# Altium PCB UWB_R_v1.4.PcbDoc (part 2 of 2)
Units mm, origin at the board's own origin, x right, y up, seen from the top; angles counter-clockwise.
Board outline 610.01 x 38.17 mm, 2 copper layers (Top Layer, Bottom Layer); 33 components, 49 nets, 295 pads, 132 vias.
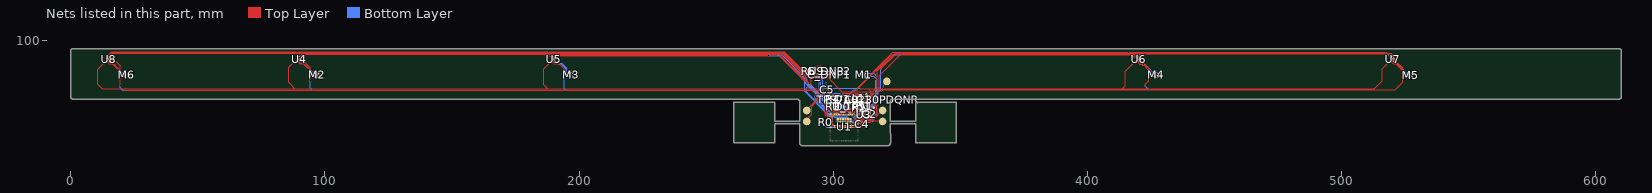
[diagram p2: the nets of this part, all layers, seen from the top]

## Via types
v1: diameter 0.3, hole 0.15, Top Layer to Bottom Layer, tented both sides, 97 vias
v2: diameter 0.3, hole 0.15, Top Layer to Bottom Layer, 23 vias
v3: diameter 0.5, hole 0.2, Top Layer to Bottom Layer, 12 vias

## Nets (pads, with @x,y where several pads share a name; then routed paths per layer and width w, separated by ;. In a path a pad name is that pad's centre, name@x,y a point inside that pad or via, vN(x,y) a via of type N, cw(c..) or ccw(c..) an arc to the next point about the centre after c; other vN are vias at no path point) (continued)
GND: C1.2 C2.2 C3.2 C4.2 C5.2 C_DNP1.1 C_DNP2.1 D0.1 D1.1 pad.14 pad.19 pad.21 R2.1 TPS7A0230PDQNR.2 TPS7A0230PDQNR.5 U1.1 U1.3 U1.5 U1.7 U1.9 U1.11 U1.13 U1.15 U1.16 U1.17 U1.19 U1.20 U1.21 U1.22 U1.23 U1.25 U1.27 U1.28 U1.29 U1.31 U1.33 U1.35 U1.37 U1.38 U1.39 U1.40 U1.41 U1.42 U1.43 U1.45 U1.47 U1.48 U1.49 U1.50 U1.51 U1.52 U1.53 U1.54 U1.55 U1.58 U1.59 U1.63 U1.71 U1.81 U1.83 U1.85 U1.87 U1.89 U1.91 U1.93 U1.95 U1.96 U1.97 U1.98 U1.99 U1.100 U1.101 U1.102 U1.103 U1.104 U1.105 U1.106 U1.107 U1.109 U1.110 U1.111 U1.112 U1.113 U1.114 U1.115 U1.116 U1.117 U1.118 U1.119 U1.120 U3.4 U3.9 U4.4 U4.9 U5.4 U5.9 U6.4 U6.9 U7.4 U7.9 U8.4 U8.9 U9.1 U9.6 U9.7 U_TPS1.3 U_TPS1.8 | length 698.2
  Top Layer w0.1: v3(15.54,92.771) 15.715,92.596 15.715,91.846 U8.4@15.74,91.821 17.907,91.821 19.558,90.17 v1(19.558,82.423) ; v1(21.082,80.645) v1(95.123,80.645) v1(194.818,80.645) v1(295.783,80.645) 296.545,79.883 296.545,79.248 v2(296.037,78.74) 291.592,74.295 291.592,71.12 289.56,69.088 pad.14@289.56,68.326 ; v3(90.466,92.837) 90.641,92.662 90.641,91.912 U4.4@90.666,91.887 92.009,91.887 94.361,89.535 v1(94.361,84.328) ; v3(190.542,92.837) 190.717,92.662 190.717,91.912 U5.4@190.742,91.887 191.45,91.887 194.183,89.154 v1(194.183,88.265) ; U9.7@292.997,88.924 U9.6@293.497,88.924 293.497,89.535 294.132,90.17 295.148,90.17 295.656,89.662 295.656,87.503 ; U9.1@294.659,87.261 295.414,87.261 295.656,87.503 ; C5.2@297.887,80.772 297.933,80.772 298.064,80.641 298.064,80.595 299.069,79.59 299.069,79.137 v1(299.466,78.74) ; C_DNP2.1@297.942,88.138 297.942,86.75 C_DNP1.1@297.951,86.741 296.164,86.741 v1(295.783,86.36) 295.783,87.376 295.656,87.503 ; U1.1@298.788,71.663 U1.1@298.961,71.49 299.204,71.247 299.654,71.247 U1.107@299.959,70.942 ; U1.16@298.811,67.09 298.811,66.34 U1.17@298.961,66.19 299.511,66.74 U1.19@300.011,66.74 ; U1.5@299.497,69.883 299.511,69.897 U1.3@299.511,70.34 299.511,70.44 U1.107@299.986,70.915 ; U1.5@299.511,69.84 U1.7@299.511,69.34 U1.9@299.511,68.84 U1.11@299.511,68.34 U1.13@299.511,67.84 U1.15@299.511,67.34 300.011,66.84 U1.19@300.011,66.74 ; U1.107@300.011,70.94 U1.105@300.511,70.94 U1.103@301.011,70.94 U1.101@301.511,70.94 U1.99@302.011,70.94 U1.97@302.511,70.94 U1.95@303.011,70.94 ; U1.20@300.261,66.04 300.511,66.29 ; U1.106@300.261,71.64 U1.104@300.761,71.64 U1.102@301.261,71.64 U1.100@301.761,71.64 U1.98@302.261,71.64 U1.96@302.761,71.64 302.761,71.29 303.011,71.04 U1.95@303.011,70.94 ; U1.22@300.761,66.04 300.761,66.14 300.661,66.24 300.561,66.24 300.511,66.29 ; U1.28@302.261,66.04 302.261,66.44 302.202,66.499 302.152,66.499 302.011,66.64 U1.27@302.011,66.74 ; v2(304.292,78.74) 304.522,78.51 D1.1@304.522,77.089 304.522,74.18 D0.1@304.534,74.168 ; U1.89@304.491,70.96 304.471,70.94 U1.91@304.011,70.94 U1.93@303.511,70.94 U1.95@303.011,70.94 ; U1.89@304.511,70.94 U1.87@305.011,70.94 U1.85@305.511,70.94 U1.83@306.011,70.94 U1.81@306.511,70.94 ; U1.117@304.761,68.34 U1.118@303.761,68.34 U1.119@302.761,68.34 U1.120@301.761,68.34 U1.114@301.761,69.34 U1.113@302.761,69.34 U1.112@303.761,69.34 U1.111@304.761,69.34 U1.110@305.744,69.34 ; v2(305.537,78.765) 305.562,78.74 307.34,78.74 ; U1.110@305.679,69.404 U1.110@305.744,69.34 ; U1.42@305.761,66.04 U1.40@305.261,66.04 U1.38@304.761,66.04 304.761,66.49 U1.37@304.511,66.74 ; U1.116@305.761,68.34 U1.115@306.761,68.34 ; v2(307.539,69.469) 307.485,69.469 307.358,69.342 306.763,69.342 U1.109@306.761,69.34 ; U1.53@308.511,66.74 U1.51@308.011,66.74 U1.49@307.511,66.74 U1.47@307.011,66.74 ; U1.63@309.011,68.84 308.111,68.84 308.052,68.781 308.052,67.999 308.111,67.94 308.911,67.94 U1.59@309.011,67.84 309.111,67.74 309.322,67.74 309.372,67.69 309.611,67.69 U1.58@309.711,67.59 310.407,67.59 C4.2@311.322,66.675 ; v2(309.561,71.49) 310.216,72.145 ; U3.4@311.259,72.045 311.159,72.145 310.216,72.145 ; U3.4@311.285,71.877 311.285,71.269 U3.9@311.434,71.12 ; C4.2@311.349,66.675 C4.2@311.322,66.675 ; v3(312.585,70.927) 312.585,70.777 312.785,70.576 313.335,70.576 313.387,70.524 C2.2@314.389,70.524 314.555,70.358 315.468,70.358 315.722,70.612 315.722,71.046 316.103,71.427 pad.21@316.103,71.501 ; pad.19@313.055,78.994 313.762,78.287 313.762,78.177 ; TPS7A0230PDQNR.2@314.267,77.165 314.248,77.146 314.073,77.146 TPS7A0230PDQNR.5@313.762,76.835 ; v1(314.833,79.248) 313.762,78.177 ; v1(315.535,79.949) 316.358,80.772 v1(424.053,80.772) 520.954,80.772 524.002,83.82 524.002,89.413 521.528,91.887 U7.4@520.815,91.887 520.79,91.912 520.79,92.662 v3(520.615,92.837) ; v3(420.666,92.837) 420.841,92.662 420.841,91.912 U6.4@420.866,91.887 421.452,91.887 421.472,91.907 424.053,89.325 424.053,84.328 422.656,82.931 v1(422.656,82.169) ; U1.19@300.011,66.74 U1.21@300.511,66.74 ; 300.511,66.29 U1.21@300.511,66.74 ; U1.21@300.511,66.74 U1.23@301.011,66.74 U1.25@301.511,66.74 U1.27@302.011,66.74 ; U1.27@302.011,66.74 U1.29@302.511,66.74 U1.31@303.011,66.74 U1.33@303.511,66.74 U1.35@304.011,66.74 U1.37@304.511,66.74 ; U1.37@304.511,66.74 U1.39@305.011,66.74 U1.41@305.511,66.74 U1.43@306.011,66.74 U1.45@306.511,66.74 U1.47@307.011,66.74 ; U1.110@305.744,69.34 U1.110@305.761,69.34 U1.109@306.761,69.34 ; U1.115@306.761,68.34 307.087,68.666 307.087,69.014 U1.109@306.761,69.34 ; U1.115@306.761,68.34 306.761,67.58 307.031,67.31 307.031,66.76 U1.47@307.011,66.74 ; U1.47@307.011,66.74 307.011,66.34 307.111,66.24 307.161,66.24 307.261,66.14 U1.48@307.261,66.04 U1.50@307.761,66.04 U1.52@308.261,66.04 U1.54@308.761,66.04 309.411,66.04 U1.55@309.561,66.19 310.837,66.19 C4.2@311.322,66.675 ; 307.34,78.74 308.102,78.74 308.483,79.121 311.095,79.121 311.313,78.903 311.313,76.477 311.372,76.418 C1.2@312.111,76.418 312.781,76.418 313.126,76.073 313.508,76.073 313.762,76.327 TPS7A0230PDQNR.5@313.762,76.835 ; 307.34,78.74 308.039,78.041 C3.2@308.039,76.835 307.948,76.744 U_TPS1.8@307.948,75.004 U_TPS1.3@307.948,73.554 308.023,73.479 308.023,73.231 308.347,72.907 309.722,72.907 310.031,73.216 310.081,73.216 310.206,73.341 310.216,73.331 310.216,72.145 ; TPS7A0230PDQNR.5@313.762,76.835 313.762,78.177
  Bottom Layer w0.1: v1(19.558,82.423) 19.558,81.661 20.574,80.645 v1(21.082,80.645) ; v1(94.361,84.328) 94.361,81.407 v1(95.123,80.645) ; v1(194.183,88.265) 194.183,81.28 v1(194.818,80.645) ; v1(295.783,80.645) v1(295.783,86.36) ; v2(296.037,78.74) v1(299.466,78.74) v2(304.292,78.74) 304.305,78.753 305.524,78.753 v2(305.537,78.765) ; v2(307.539,69.469) 307.544,69.469 307.925,69.85 307.925,69.854 v2(309.561,71.49) ; v1(314.833,79.248) v1(315.535,79.949) ; v1(422.656,82.169) v1(424.053,80.772)
  other v3: 311.485,70.927 14.44,92.771 89.366,92.837 189.442,92.837 419.566,92.837 519.515,92.837
HB1_H: U1.73 U3.5 | length 3.2
  Top Layer w0.1: U1.73@308.511,70.94 310.447,70.94 311.285,70.102 U3.5@311.285,69.977
HB1_V: U1.61 U3.6 | length 5.3
  Top Layer w0.1: v2(308.343,68.368) 308.983,68.368 U1.61@309.011,68.34 ; v2(310.515,69.342) 311.531,69.342 311.785,69.596 U3.6@311.785,69.977
  Bottom Layer w0.1: v2(308.343,68.368) 310.049,68.368 310.515,68.834 v2(310.515,69.342)
HB2_H: U1.80 U4.5 | length 226.5
  Top Layer w0.1: U4.5@90.666,93.787 90.666,94.146 91.262,94.742 278.13,94.742 v1(289.687,83.185) ; v1(304.546,72.898) 304.927,72.517 306.197,72.517 306.733,71.981 306.733,71.668 U1.80@306.761,71.64
  Bottom Layer w0.1: v1(289.687,83.185) 297.434,75.438 302.006,75.438 v1(304.546,72.898)
HB2_V: U1.82 U4.6 | length 228.5
  Top Layer w0.1: U4.6@90.166,93.787 90.166,93.912 91.25,94.996 279.908,94.996 v1(289.814,85.09) ; v1(304.038,72.898) 304.673,72.263 305.943,72.263 306.225,71.981 306.225,71.676 U1.82@306.261,71.64
  Bottom Layer w0.1: v1(289.814,85.09) 289.814,84.387 289.22,83.793 289.22,83.144 297.18,75.184 301.752,75.184 v1(304.038,72.898)
HB3_H: U1.78 U5.5 | length 126.5
  Top Layer w0.1: U5.5@190.742,93.787 190.767,93.812 190.767,94.12 190.881,94.234 v1(274.574,94.234) ; v1(279.4,94.107) 289.723,83.784 v1(289.723,83.744) ; v1(305.054,72.898) 306.324,72.898 307.241,71.981 307.241,71.66 U1.78@307.261,71.64
  Bottom Layer w0.1: v1(274.574,94.234) 279.241,94.234 279.368,94.107 v1(279.4,94.107) ; v1(289.723,83.744) 289.723,83.657 297.688,75.692 302.26,75.692 v1(305.054,72.898)
HB3_V: U1.76 U5.6 | length 127.7
  Top Layer w0.1: U5.6@190.242,93.787 190.242,93.912 190.818,94.488 v1(277.749,94.488) ; v1(289.052,85.09) 289.052,84.836 v1(290.703,83.185) ; v1(305.181,73.279) 306.451,73.279 307.749,71.981 307.749,71.652 U1.76@307.761,71.64
  Bottom Layer w0.1: v1(277.749,94.488) 279.654,94.488 v1(289.052,85.09) ; v1(290.703,83.185) 297.942,75.946 302.514,75.946 v1(305.181,73.279)
HB4_H: U1.74 U6.5 | length 128.5
  Top Layer w0.1: U1.74@308.261,71.64 308.261,72.041 308.737,72.517 v1(309.753,72.517) ; v1(316.23,78.994) v1(317.627,80.391) ; v1(318.071,81.524) 318.071,86.296 326.517,94.742 420.37,94.742 420.866,94.246 U6.5@420.866,93.787
  Bottom Layer w0.1: v1(309.753,72.517) 310.134,72.517 310.769,73.152 310.769,75.184 311.404,75.819 314.833,75.819 316.23,77.216 v1(316.23,78.994) ; v1(317.627,80.391) 318.071,80.835 v1(318.071,81.524)
HB4_V: U1.90 U6.6 | length 130.4
  Top Layer w0.1: v1(303.784,72.517) 304.261,72.04 U1.90@304.261,71.64 ; v1(309.245,80.772) v1(322.961,94.488) ; v1(326.771,94.488) 420.116,94.488 420.366,94.238 U6.6@420.366,93.787
  Bottom Layer w0.1: v1(303.784,72.517) 305.197,72.517 305.435,72.755 305.435,78.105 308.102,80.772 v1(309.245,80.772) ; v1(322.961,94.488) v1(326.771,94.488)
HB5_H: U1.67 U7.5 | length 231.3
  Top Layer w0.1: v1(308.483,69.85) 309.001,69.85 U1.67@309.011,69.84 ; v1(317.373,81.534) 317.373,88.265 324.358,95.25 519.477,95.25 520.815,93.912 U7.5@520.815,93.787
  Bottom Layer w0.1: v1(308.483,69.85) 310.261,71.628 310.261,72.136 310.769,72.644 313.563,72.644 317.373,76.454 v1(317.373,81.534)
HB5_V: U1.65 U7.6 | length 230.8
  Top Layer w0.1: v1(308.483,69.342) 308.485,69.34 U1.65@309.011,69.34 ; v1(318.77,89.027) 324.739,94.996 519.231,94.996 520.315,93.912 U7.6@520.315,93.787
  Bottom Layer w0.1: v1(308.483,69.342) 310.515,71.374 310.515,72.009 310.896,72.39 313.817,72.39 317.754,76.327 317.754,79.883 318.77,80.899 v1(318.77,89.027)
HB6_H: U1.56 U8.5 | length 311.2
  Top Layer w0.1: U8.5@15.74,93.721 15.74,94.48 16.51,95.25 280.162,95.25 v1(289.433,85.979) ; v1(308.991,66.929) 309.045,66.929 309.106,66.99 309.611,66.99 U1.56@309.711,67.09
  Bottom Layer w0.1: v1(289.433,85.979) 289.433,84.884 288.723,84.174 288.723,80.212 298.069,70.866 299.466,70.866 300.355,69.977 305.435,69.977 308.445,66.967 308.953,66.967 v1(308.991,66.929)
HB6_V: U1.57 U8.6 | length 312.4
  Top Layer w0.1: U8.6@15.24,93.721 15.24,94.488 16.256,95.504 280.416,95.504 291.338,84.582 291.338,83.058 v1(290.068,81.788) ; v1(308.356,67.437) 308.453,67.34 U1.57@309.011,67.34
  Bottom Layer w0.1: v1(290.068,81.788) 289.687,81.788 289.306,81.407 289.306,80.01 298.196,71.12 299.593,71.12 300.482,70.231 305.562,70.231 v1(308.356,67.437)
LED0: R3.1 U1.2 | length 5.4
  Top Layer w0.1: U1.2@298.811,70.59 297.837,70.59 297.434,70.993 297.434,72.512 297.443,72.512 298.999,74.068 R3.1@298.999,74.168
LED1: R4.1 U1.4 | length 9.7
  Top Layer w0.1: U1.4@298.811,70.09 297.702,70.09 296.926,70.866 296.926,75.692 298.233,76.999 298.909,76.999 R4.1@298.999,77.089
M1N: M1.2 U3.3 | length 22.4
  Top Layer w0.1: U3.3@311.785,71.877 v1(311.785,73.025) ; M1.2@311.979,87.214 v1(312.014,87.249) ; v1(316.611,84.836) v1(316.611,85.979)
  Bottom Layer w0.1: v1(311.785,73.025) 312.166,73.406 313.436,73.406 316.611,76.581 v1(316.611,84.836) ; v1(312.014,87.249) 315.976,87.249 316.611,86.614 v1(316.611,85.979)
M1P: M1.1 U3.2 | length 21.3
  Top Layer w0.1: U3.2@312.285,71.877 312.289,71.881 312.289,73.021 v1(312.293,73.025)
  Bottom Layer w0.1: v1(312.013,86.042) 312.077,86.106 315.976,86.106 316.992,85.09 316.992,76.581 313.436,73.025 v1(312.293,73.025)
M2N: M2.2 U4.3 | length 9
  Top Layer w0.1: U4.3@90.166,91.887 90.166,91.444 90.297,91.313 91.694,91.313 v1(93.853,89.154)
  Bottom Layer w0.1: v1(93.853,89.154) 95.793,87.214 v1(96.968,87.214)
M2P: M2.1 U4.2 | length 10.4
  Top Layer w0.1: U4.2@89.666,91.887 89.666,91.436 90.17,90.932 91.44,90.932 v1(93.604,88.768)
  Bottom Layer w0.1: v1(93.604,88.768) 94.996,87.376 94.996,86.673 95.69,85.979 96.933,85.979 v1(96.968,86.014)
M3N: M3.2 U5.3 | length 9.7
  Top Layer w0.1: U5.3@190.242,91.887 190.242,91.444 190.373,91.313 v1(191.643,91.313)
  Bottom Layer w0.1: v1(191.643,91.313) 193.167,91.313 195.199,89.281 195.199,87.884 195.777,87.306 v1(196.977,87.306)
M3P: M3.1 U5.2 | length 11.3
  Top Layer w0.1: U5.2@189.742,91.887 189.742,91.309 190.119,90.932 v1(192.024,90.932)
  Bottom Layer w0.1: v1(192.024,90.932) 192.913,90.932 194.691,89.154 194.691,86.868 195.453,86.106 v1(196.977,86.106)
M4N: M4.2 U6.3 | length 8.7
  Top Layer w0.1: U6.3@420.366,91.887 420.441,91.812 420.441,91.622 420.75,91.313 421.513,91.313 v1(422.021,90.805)
  Bottom Layer w0.1: v1(422.021,90.805) 422.555,90.805 426.146,87.214 v1(427.041,87.214)
M4P: M4.1 U6.2 | length 10.5
  Top Layer w0.1: U6.2@419.866,91.887 419.866,91.436 420.497,90.805 421.259,90.805 421.64,90.424 422.275,90.424 v1(423.545,89.154)
  Bottom Layer w0.1: v1(423.545,89.154) 424.942,87.757 424.942,86.673 425.601,86.014 v1(427.041,86.014)
M5N: M5.2 U7.3 | length 8.8
  Top Layer w0.1: U7.3@520.315,91.887 520.315,91.771 520.39,91.696 520.59,91.696 520.973,91.313 521.589,91.313 v1(523.367,89.535)
  Bottom Layer w0.1: v1(523.367,89.535) 525.723,87.179 v1(527.05,87.179)
M5P: M5.1 U7.2 | length 10
  Top Layer w0.1: U7.2@519.815,91.887 519.815,91.309 520.192,90.932 521.208,90.932 v1(523.367,88.773)
  Bottom Layer w0.1: v1(523.367,88.773) 526.161,85.979 v1(527.05,85.979)
M6N: M6.2 U8.3 | length 8.9
  Top Layer w0.1: U8.3@15.24,91.821 15.24,91.44 15.494,91.186 16.764,91.186 v1(19.05,88.9)
  Bottom Layer w0.1: v1(19.05,88.9) 20.701,87.249 22.003,87.249 v1(22.038,87.214)
M6P: M6.1 U8.2 | length 10.4
  Top Layer w0.1: U8.2@14.74,91.821 14.74,91.305 15.113,90.932 16.383,90.932 18.943,88.372 v1(18.945,88.372)
  Bottom Layer w0.1: v1(18.945,88.372) 19.939,87.378 19.939,86.741 20.666,86.014 v1(22.038,86.014)
NetD0_2: D0.2 R3.2 | length 2.1
  Top Layer w0.1: R3.2@300.949,74.168 D0.2@303.034,74.168
NetD1_2: D1.2 R4.2 | length 2.1
  Top Layer w0.1: R4.2@300.949,77.089 D1.2@303.022,77.089
NetL1_1: L1.1 U_TPS1.9 | length 4.8
  Top Layer w0.1: v2(308.809,78.232) 310.041,78.232 L1.1@310.079,78.27
  Bottom Layer w0.1: v2(307.456,75.325) 308.809,76.677 v2(308.809,78.232)
NetL1_2: L1.2 U_TPS1.7 | length 2.4
  Top Layer w0.1: U_TPS1.7@308.448,75.204 308.448,75.529 309.229,76.31 309.229,76.32 309.579,76.67 L1.2@310.079,76.67
NetR1_1: R1.1 R2.2 U_TPS1.4 | length 3.6
  Top Layer w0.1: U_TPS1.4@308.448,73.554 308.448,73.729 308.76,74.041 R2.2@310.206,74.041 310.206,74.091 310.331,74.216 310.381,74.216 310.587,74.422 R1.1@311.531,74.422
NetR5_2: R5.2 U9.12 | length 4.2
  Top Layer w0.1: R5.2@290.764,88.138 290.764,87.061 291.592,86.233 292.481,86.233 292.997,86.749 U9.12@292.997,87.098
NetU1_30: U1.30 U1.32 | length 0.5
  Top Layer w0.1: U1.30@302.761,66.04 U1.32@303.261,66.04
NetU1_34: U1.34 U1.36 | length 0.5
  Top Layer w0.1: U1.34@303.761,66.04 U1.36@304.261,66.04
NetU1_44: U1.44 U1.46 | length 0.5
  Top Layer w0.1: U1.44@306.261,66.04 U1.46@306.761,66.04
nRESET: pad.18 U1.66 | length 23.2
  Top Layer w0.1: U1.66@309.711,69.59 310.328,69.59 310.461,69.723 v1(310.515,69.723) ; v1(317.246,71.628) 317.246,79.502 318.135,80.391 v1(319.024,80.391) ; v1(319.786,81.407) 319.786,82.804 pad.18@321.056,84.074
  Bottom Layer w0.1: v1(310.515,69.723) 310.896,69.342 314.96,69.342 v1(317.246,71.628) ; v1(319.024,80.391) 319.748,81.115 319.748,81.369 v1(319.786,81.407)
SCL: U1.92 U9.13 | length 23.7
  Top Layer w0.1: v1(293.497,86.233) U9.13@293.497,87.098 ; v1(293.624,78.232) 295.021,79.629 v1(295.021,80.137) ; v1(298.958,72.771) 302.976,72.771 303.761,71.986 U1.92@303.761,71.64
  Bottom Layer w0.1: v1(293.497,86.233) 295.021,84.709 v1(295.021,80.137) ; v1(293.624,78.232) 293.624,77.216 298.069,72.771 v1(298.958,72.771)
SDA: U1.94 U9.14 | length 24.8
  Top Layer w0.1: v1(292.989,78.232) 292.989,78.613 v1(294.513,80.137) ; U9.14@293.997,87.098 293.997,86.422 294.132,86.287 v1(294.132,86.233) ; v1(294.513,84.582) 295.078,85.147 v1(295.522,85.147) ; v1(298.953,72.376) 298.967,72.39 302.895,72.39 303.261,72.024 U1.94@303.261,71.64
  Bottom Layer w0.1: v1(292.989,78.232) 292.989,77.216 297.829,72.376 v1(298.953,72.376) ; v1(294.132,86.233) 294.436,86.233 v1(295.522,85.147) ; v1(294.513,80.137) v1(294.513,84.582)
SWDCLK: pad.15 U1.64 | length 11.2
  Top Layer w0.1: U1.64@309.711,69.09 315.724,69.09 319.278,72.644 pad.15@319.405,72.644
SWDIO: pad.16 U1.62 | length 9.8
  Top Layer w0.1: U1.62@309.711,68.59 319.141,68.59 pad.16@319.405,68.326
TPS_MODE: U1.77 U_TPS1.2 | length 3.9
  Top Layer w0.1: v2(307.285,70.358) 307.285,70.412 307.411,70.538 307.411,70.84 U1.77@307.511,70.94
  Bottom Layer w0.1: v2(307.285,70.358) 307.285,70.412 307.451,70.578 v2(307.451,73.543)
TPS_T_EN: U1.79 U_TPS1.1 | length 3.9
  Top Layer w0.1: v2(306.777,70.358) 306.777,70.412 306.911,70.546 306.911,70.84 U1.79@307.011,70.94
  Bottom Layer w0.1: v2(306.777,70.358) 306.777,70.412 306.948,70.583 v2(306.948,73.554)
UWB_ANT: R0.1 U1.24 | length 5.6
  Top Layer w0.1: v2(296.998,66.802) R0.1@296.998,67.647
  Bottom Layer w0.1: v2(296.998,66.802) 296.998,66.421 297.379,66.04 v2(301.261,66.04)
VBAT: C1.1 C3.1 pad.13 TPS7A0230PDQNR.3 TPS7A0230PDQNR.4 U_TPS1.10 | length 34.6
  Top Layer w0.1: pad.13@289.56,72.644 289.56,73.025 295.91,79.375 v2(296.037,79.375) ; v2(303.149,79.375) 304.245,79.375 ; U_TPS1.10@306.948,75.204 306.948,76.672 C3.1@306.785,76.835 306.785,76.862 306.456,77.191 306.429,77.191 304.245,79.375 ; TPS7A0230PDQNR.4@313.303,76.489 313.118,76.674 313.118,76.996 TPS7A0230PDQNR.3@313.303,77.181 313.262,77.181 313.099,77.343 C1.1@312.111,77.343 311.999,77.455 311.999,78.852 311.476,79.375 304.245,79.375
  Bottom Layer w0.1: v2(296.037,79.375) v2(303.149,79.375)
VDD: C4.1 pad.20 R5.1 TPS7A0230PDQNR.1 U1.60 U3.7 U3.8 U4.7 U4.8 U5.7 U5.8 U6.7 U6.8 U7.7 U7.8 U8.7 U8.8 U9.5 U9.8 | length 571.3
  Top Layer w0.1: U8.8@14.24,93.721 U8.7@14.74,93.721 14.74,94.369 16.129,95.758 v1(89.281,95.758) v1(187.96,95.758) 280.67,95.758 289.306,87.122 ; U4.8@89.166,93.787 U4.7@89.666,93.787 89.666,94.738 v1(89.662,94.742) ; v1(187.935,94.243) 188.391,93.787 U5.8@189.242,93.787 U5.7@189.742,93.787 ; R5.1@289.814,88.138 289.814,88.587 290.254,89.027 291.534,89.027 291.8,88.761 U9.8@292.222,88.761 ; R5.1@289.916,88.138 289.641,87.863 289.641,87.722 289.306,87.387 289.306,87.122 ; U9.8@292.335,88.761 292.354,88.781 v1(292.354,89.789) ; U9.5@293.997,88.924 293.997,89.527 v1(294.259,89.789) ; U1.60@309.711,68.09 311.188,68.09 C4.1@311.349,67.929 311.365,67.945 v1(315.087,67.945) ; U3.7@312.234,70.17 312.734,70.17 U3.8@312.734,70.045 ; U3.8@312.785,69.977 312.785,69.852 313.168,69.469 315.54,69.469 v1(315.794,69.723) 316.865,70.794 316.865,74.168 316.23,74.803 314.96,74.803 314.267,75.496 TPS7A0230PDQNR.1@314.267,76.505 314.267,76.523 314.96,77.216 pad.20@314.96,78.232 pad.20@314.96,78.389 ; pad.20@314.96,78.476 pad.20@314.96,78.389 ; v1(417.957,93.726) 419.305,93.726 U6.8@419.366,93.787 U6.7@419.866,93.787 ; v1(517.398,95.504) v1(416.179,95.504) 323.469,95.504 307.975,80.01 ; v1(518.541,94.361) 518.965,93.937 519.24,93.937 519.315,93.862 U7.8@519.315,93.787 U7.7@519.815,93.787 ; 289.306,87.122 290.957,85.471 297.942,85.471 303.403,80.01 307.975,80.01 ; 307.975,80.01 314.579,80.01 315.3,79.289 315.3,78.729 pad.20@314.96,78.389
  Bottom Layer w0.1: v1(89.281,95.758) 89.662,95.377 v1(89.662,94.742) ; v1(187.935,94.243) 187.452,94.726 187.452,95.25 v1(187.96,95.758) ; v1(292.354,89.789) v1(294.259,89.789) ; v1(315.087,67.945) 315.794,68.652 v1(315.794,69.723) ; v1(416.179,95.504) v1(417.957,93.726) ; v1(517.398,95.504) v1(518.541,94.361)
VMOT: C2.1 pad.22 R1.2 U3.1 U4.1 U5.1 U6.1 U7.1 U8.1 U_TPS1.6 | length 589.9
  Top Layer w0.1: U8.1@14.24,91.821 13.589,91.821 10.668,88.9 10.668,82.931 12.446,81.153 88.265,81.153 ; U4.1@89.166,91.887 87.95,91.887 85.725,89.662 85.725,83.693 88.265,81.153 ; U5.1@189.242,91.887 188.915,91.887 186.055,89.027 186.055,82.804 187.706,81.153 ; v2(296.418,81.407) 296.164,81.153 187.706,81.153 ; U_TPS1.6@308.948,75.204 311.678,75.204 311.912,75.438 v2(313.563,75.438) 313.563,75.054 313.031,74.522 R1.2@313.031,74.422 ; v2(310.686,81.13) 313.84,81.13 ; U3.1@312.785,71.877 314.141,71.877 C2.1@314.189,71.925 ; R1.2@313.031,74.391 313.381,74.041 313.817,74.041 314.389,73.469 C2.1@314.389,71.726 314.716,72.053 314.716,72.771 315.732,73.787 pad.22@315.976,73.787 ; v2(314.96,75.438) 315.722,76.2 315.722,79.248 313.84,81.13 ; U6.1@419.366,91.887 418.658,91.887 414.909,88.138 414.909,82.423 413.639,81.153 413.639,81.13 ; U7.1@519.315,91.887 519.254,91.948 518.922,91.948 516.001,89.027 516.001,84.328 512.803,81.13 413.639,81.13 ; 88.265,81.153 187.706,81.153 ; 313.84,81.13 413.639,81.13
  Bottom Layer w0.1: v2(296.418,81.407) 310.409,81.407 v2(310.686,81.13) ; v2(313.563,75.438) v2(314.96,75.438)
pads on no net: U1.6 U1.8 U1.10 U1.12 U1.14 U1.18 U1.68 U1.69 U1.70 U1.72 U1.75 U1.84 U1.86 U1.88 U1.108 U1.121 U1.122 U1.123 U1.124 U1.125 U1.126 U1.127 U1.128 U1.129 U1.130 U1.131 U1.132 U1.133 U1.134 U1.135 U1.136 U1.137 U1.138 U1.139 U1.140 U1.141 U1.142 U1.143 U1.144 U1.145 U1.146 U1.147 U1.148 U1.149 U1.150 U1.151 U1.152 U1.153 U1.154 U1.155 U1.156 U1.157 U9.2 U9.3 U9.4 U9.9 U9.10 U9.11 U_TPS1.5
copper on no net: | length 70
  Top Layer w0.013: 333.403,63.677 333.604,63.677 333.591,63.528 333.503,62.532 333.416,63.528 333.403,63.677 ; 333.403,67.492 333.604,67.492 333.591,67.342 333.503,66.346 333.416,67.342 333.403,67.492 ; 333.403,71.306 333.604,71.306 333.591,71.157 333.503,70.16 333.416,71.157 333.403,71.306 ; 333.403,75.12 333.416,74.971 333.503,73.975 333.591,74.971 333.604,75.12 333.403,75.12 ; 335.616,63.677 335.817,63.677 335.803,63.528 335.716,62.532 335.629,63.528 335.616,63.677 ; 335.616,67.492 335.817,67.492 335.803,67.342 335.716,66.346 335.629,67.342 335.616,67.492 ; 335.616,71.306 335.817,71.306 335.803,71.157 335.716,70.16 335.629,71.157 335.616,71.306 ; 335.616,75.12 335.629,74.971 335.716,73.975 335.803,74.971 335.817,75.12 335.616,75.12 ; 337.829,63.677 338.029,63.677 338.016,63.528 337.929,62.532 337.842,63.528 337.829,63.677 ; 337.829,67.492 338.029,67.492 338.016,67.342 337.929,66.346 337.842,67.342 337.829,67.492 ; 337.829,71.306 338.029,71.306 338.016,71.157 337.929,70.16 337.842,71.157 337.829,71.306 ; 337.829,75.12 337.842,74.971 337.929,73.975 338.016,74.971 338.029,75.12 337.829,75.12 ; 340.042,63.677 340.242,63.677 340.229,63.528 340.142,62.532 340.055,63.528 340.042,63.677 ; 340.042,67.492 340.242,67.492 340.229,67.342 340.142,66.346 340.055,67.342 340.042,67.492 ; 340.042,71.306 340.242,71.306 340.229,71.157 340.142,70.16 340.055,71.157 340.042,71.306 ; 340.042,75.12 340.055,74.971 340.142,73.975 340.229,74.971 340.242,75.12 340.042,75.12 ; 342.254,63.677 342.455,63.677 342.442,63.528 342.355,62.532 342.267,63.528 342.254,63.677 ; 342.254,67.492 342.455,67.492 342.442,67.342 342.355,66.346 342.267,67.342 342.254,67.492 ; 342.254,71.306 342.455,71.306 342.442,71.157 342.355,70.16 342.267,71.157 342.254,71.306 ; 342.254,75.12 342.267,74.971 342.355,73.975 342.442,74.971 342.455,75.12 342.254,75.12 ; 344.467,63.677 344.668,63.677 344.655,63.528 344.567,62.532 344.48,63.528 344.467,63.677 ; 344.467,67.492 344.668,67.492 344.655,67.342 344.567,66.346 344.48,67.342 344.467,67.492 ; 344.467,71.306 344.668,71.306 344.655,71.157 344.567,70.16 344.48,71.157 344.467,71.306 ; 344.467,75.12 344.48,74.971 344.567,73.975 344.655,74.971 344.668,75.12 344.467,75.12 ; 346.68,63.677 346.693,63.528 346.78,62.532 346.867,63.528 346.88,63.677 346.68,63.677 ; 346.68,67.492 346.88,67.492 346.867,67.342 346.78,66.346 346.693,67.342 346.68,67.492 ; 346.68,71.306 346.88,71.306 346.867,71.157 346.78,70.16 346.693,71.157 346.68,71.306 ; 346.68,75.12 346.693,74.971 346.78,73.975 346.867,74.971 346.88,75.12 346.68,75.12

## Polygon pours and split planes (outlines as drawn)
no net on Top Layer "NONET_L01_P000" (solid, pour order 0): 293.418,95.631 299.418,95.631 299.418,96.431 293.418,96.431
ANT_MONO on Top Layer "ANT_MONO_L01_P001" (solid, pour order 1): 293.418,91.631 299.418,91.631 299.418,90.831 293.418,90.831
no net on Multi-Layer "NONET_L-01_P-001" (none): 261.717,61.132 261.841,60.916 261.967,61.133 262.017,61.22 261.667,61.219

## Other copper
Top Layer:
  region: 337.842,71.157 337.829,71.306 338.029,71.306 338.016,71.157 337.929,70.16
  region: 337.842,67.342 337.829,67.492 338.029,67.492 338.016,67.342 337.929,66.346
  region: 335.716,70.16 335.629,71.157 335.616,71.306 335.817,71.306 335.803,71.157
  region: 335.716,66.346 335.629,67.342 335.616,67.492 335.817,67.492 335.803,67.342
  region: 333.503,70.16 333.416,71.157 333.403,71.306 333.604,71.306 333.591,71.157
  region: 333.503,66.346 333.416,67.342 333.403,67.492 333.604,67.492 333.591,67.342
  region: 333.503,62.532 333.416,63.528 333.403,63.677 333.604,63.677 333.591,63.528
  region: 335.716,73.975 335.803,74.971 335.817,75.12 335.616,75.12 335.629,74.971
  region: 337.842,74.971 337.829,75.12 338.029,75.12 338.016,74.971 337.929,73.975
  region: 337.842,63.528 337.829,63.677 338.029,63.677 338.016,63.528 337.929,62.532
  region: 335.716,62.532 335.629,63.528 335.616,63.677 335.817,63.677 335.803,63.528
  region: 333.503,73.975 333.416,74.971 333.403,75.12 333.604,75.12 333.591,74.971
  region: 346.78,70.16 346.693,71.157 346.68,71.306 346.88,71.306 346.867,71.157
  region: 346.78,66.346 346.693,67.342 346.68,67.492 346.88,67.492 346.867,67.342
  region: 344.48,71.157 344.467,71.306 344.668,71.306 344.655,71.157 344.567,70.16
  region: 344.48,67.342 344.467,67.492 344.668,67.492 344.655,67.342 344.567,66.346
  region: 342.267,71.157 342.254,71.306 342.455,71.306 342.442,71.157 342.355,70.16
  region: 342.254,67.492 342.455,67.492 342.442,67.342 342.355,66.346 342.267,67.342
  region: 340.142,70.16 340.055,71.157 340.042,71.306 340.242,71.306 340.229,71.157
  region: 340.142,66.346 340.055,67.342 340.042,67.492 340.242,67.492 340.229,67.342
  region: 340.042,63.677 340.242,63.677 340.229,63.528 340.142,62.532 340.055,63.528
  region: 342.267,63.528 342.254,63.677 342.455,63.677 342.442,63.528 342.355,62.532
  region: 344.48,74.971 344.467,75.12 344.668,75.12 344.655,74.971 344.567,73.975
  region: 346.78,62.532 346.693,63.528 346.68,63.677 346.88,63.677 346.867,63.528
  region: 340.042,75.12 340.242,75.12 340.229,74.971 340.142,73.975 340.055,74.971
  region: 342.267,74.971 342.254,75.12 342.455,75.12 342.442,74.971 342.355,73.975
  region: 344.48,63.528 344.467,63.677 344.668,63.677 344.655,63.528 344.567,62.532
  region: 346.78,73.975 346.693,74.971 346.68,75.12 346.88,75.12 346.867,74.971
  region: 261.717,63.9 261.841,63.684 261.967,63.901 262.017,63.987 261.667,63.987
  region: 271.985,63.9 272.11,63.684 272.235,63.901 272.285,63.987 271.935,63.987
  region: 270.274,63.9 270.399,63.684 270.524,63.901 270.574,63.987 270.224,63.987
  region: 273.697,63.9 273.821,63.684 273.947,63.901 273.997,63.987 273.647,63.987
  region: 268.562,63.9 268.687,63.684 268.812,63.901 268.862,63.987 268.512,63.987
  region: 266.801,63.987 266.851,63.9 266.976,63.684 267.101,63.901 267.151,63.987
  region: 265.09,63.987 265.14,63.9 265.264,63.684 265.39,63.901 265.44,63.987
  region: 275.358,63.987 275.408,63.9 275.533,63.684 275.658,63.901 275.708,63.987
  region: 263.428,63.9 263.553,63.684 263.678,63.901 263.728,63.987 263.378,63.987
  region: 261.717,66.668 261.841,66.452 261.967,66.668 262.017,66.755 261.667,66.754
  region: 261.717,69.435 261.841,69.219 261.967,69.436 262.017,69.523 261.667,69.522
  region: 263.428,72.203 263.553,71.987 263.678,72.204 263.728,72.29 263.378,72.29
  region: 265.09,72.29 265.14,72.203 265.264,71.987 265.39,72.204 265.44,72.29
  region: 268.512,72.29 268.562,72.203 268.687,71.987 268.812,72.204 268.862,72.29
  region: 263.428,66.668 263.553,66.452 263.678,66.668 263.728,66.755 263.378,66.754
  region: 261.717,72.203 261.841,71.987 261.967,72.204 262.017,72.29 261.667,72.29
  region: 273.697,66.668 273.821,66.452 273.947,66.668 273.997,66.755 273.647,66.754
  region: 275.408,66.668 275.533,66.452 275.658,66.668 275.708,66.755 275.358,66.754
  region: 270.224,66.754 270.274,66.668 270.399,66.452 270.524,66.668 270.574,66.755
  region: 268.562,66.668 268.687,66.452 268.812,66.668 268.862,66.755 268.512,66.754
  region: 271.935,66.754 271.985,66.668 272.11,66.452 272.235,66.668 272.285,66.755
  region: 265.09,66.754 265.14,66.668 265.264,66.452 265.39,66.668 265.44,66.755
  region: 266.801,66.754 267.151,66.755 267.101,66.668 266.976,66.452 266.851,66.668
  region: 263.428,69.435 263.553,69.219 263.678,69.436 263.728,69.523 263.378,69.522
  region: 268.512,69.522 268.562,69.435 268.687,69.219 268.812,69.436 268.862,69.523
  region: 265.09,69.522 265.14,69.435 265.264,69.219 265.39,69.436 265.44,69.523
  region: 266.801,69.522 266.851,69.435 266.976,69.219 267.101,69.436 267.151,69.523
  region: 270.224,69.522 270.274,69.435 270.399,69.219 270.524,69.436 270.574,69.523
  region: 271.985,69.435 272.11,69.219 272.235,69.436 272.285,69.523 271.935,69.522
  region: 273.697,69.435 273.821,69.219 273.947,69.436 273.997,69.523 273.647,69.522
  region: 275.358,69.522 275.408,69.435 275.533,69.219 275.658,69.436 275.708,69.523
  region: 266.801,72.29 266.851,72.203 266.976,71.987 267.101,72.204 267.151,72.29
  region: 270.274,72.203 270.399,71.987 270.524,72.204 270.574,72.29 270.224,72.29
  region: 271.985,72.203 272.11,71.987 272.235,72.204 272.285,72.29 271.935,72.29
  region: 273.697,72.203 273.821,71.987 273.947,72.204 273.997,72.29 273.647,72.29
  region: 275.408,72.203 275.533,71.987 275.658,72.204 275.708,72.29 275.358,72.29
  region: 270.224,75.057 270.274,74.971 270.399,74.755 270.524,74.972 270.574,75.058
  region: 268.512,75.057 268.562,74.971 268.687,74.755 268.812,74.972 268.862,75.058
  region: 266.801,75.057 267.151,75.058 267.101,74.972 266.976,74.755 266.851,74.971
  region: 265.09,75.057 265.14,74.971 265.264,74.755 265.39,74.972 265.44,75.058
  region: 275.408,74.971 275.533,74.755 275.658,74.972 275.708,75.058 275.358,75.057
  region: 273.697,74.971 273.821,74.755 273.947,74.972 273.997,75.058 273.647,75.057
  region: 272.11,74.755 272.235,74.972 272.285,75.058 271.935,75.057 271.985,74.971
  region: 261.717,74.971 261.841,74.755 261.967,74.972 262.017,75.058 261.667,75.057
  region: 263.428,74.971 263.553,74.755 263.678,74.972 263.728,75.058 263.378,75.057
  region: 266.801,61.219 266.851,61.132 266.976,60.916 267.101,61.133 267.151,61.22
  region: 275.408,61.132 275.533,60.916 275.658,61.133 275.708,61.22 275.358,61.219
  region: 271.935,61.219 271.985,61.132 272.11,60.916 272.235,61.133 272.285,61.22
  region: 270.224,61.219 270.274,61.132 270.399,60.916 270.524,61.133 270.574,61.22
  region: 265.14,61.132 265.264,60.916 265.39,61.133 265.44,61.22 265.09,61.219
  region: 263.378,61.219 263.428,61.132 263.553,60.916 263.678,61.133 263.728,61.22
  region: 261.717,61.132 261.841,60.916 261.967,61.133 262.017,61.22 261.667,61.219
  region: 268.562,61.132 268.687,60.916 268.812,61.133 268.862,61.22 268.512,61.219
  region: 273.697,61.132 273.821,60.916 273.947,61.133 273.997,61.22 273.647,61.219

## Silkscreen, mask and mechanical layers (free items; w line width, h text height)
Top Solder:
  drawing of 277 lines, arcs and shapes, not listed
Mechanical 1:
  drawing of 648 lines, arcs and shapes, not listed